# Altium PCB GPSDO_V2.0.PcbDoc (part 2 of 3)
Units mil, origin at the board's own origin, x right, y up, seen from the top; angles counter-clockwise.
Board outline 3461 x 3930 mil, 2 copper layers (Top Layer, Bottom Layer); 97 components, 56 nets, 415 pads, 225 vias.
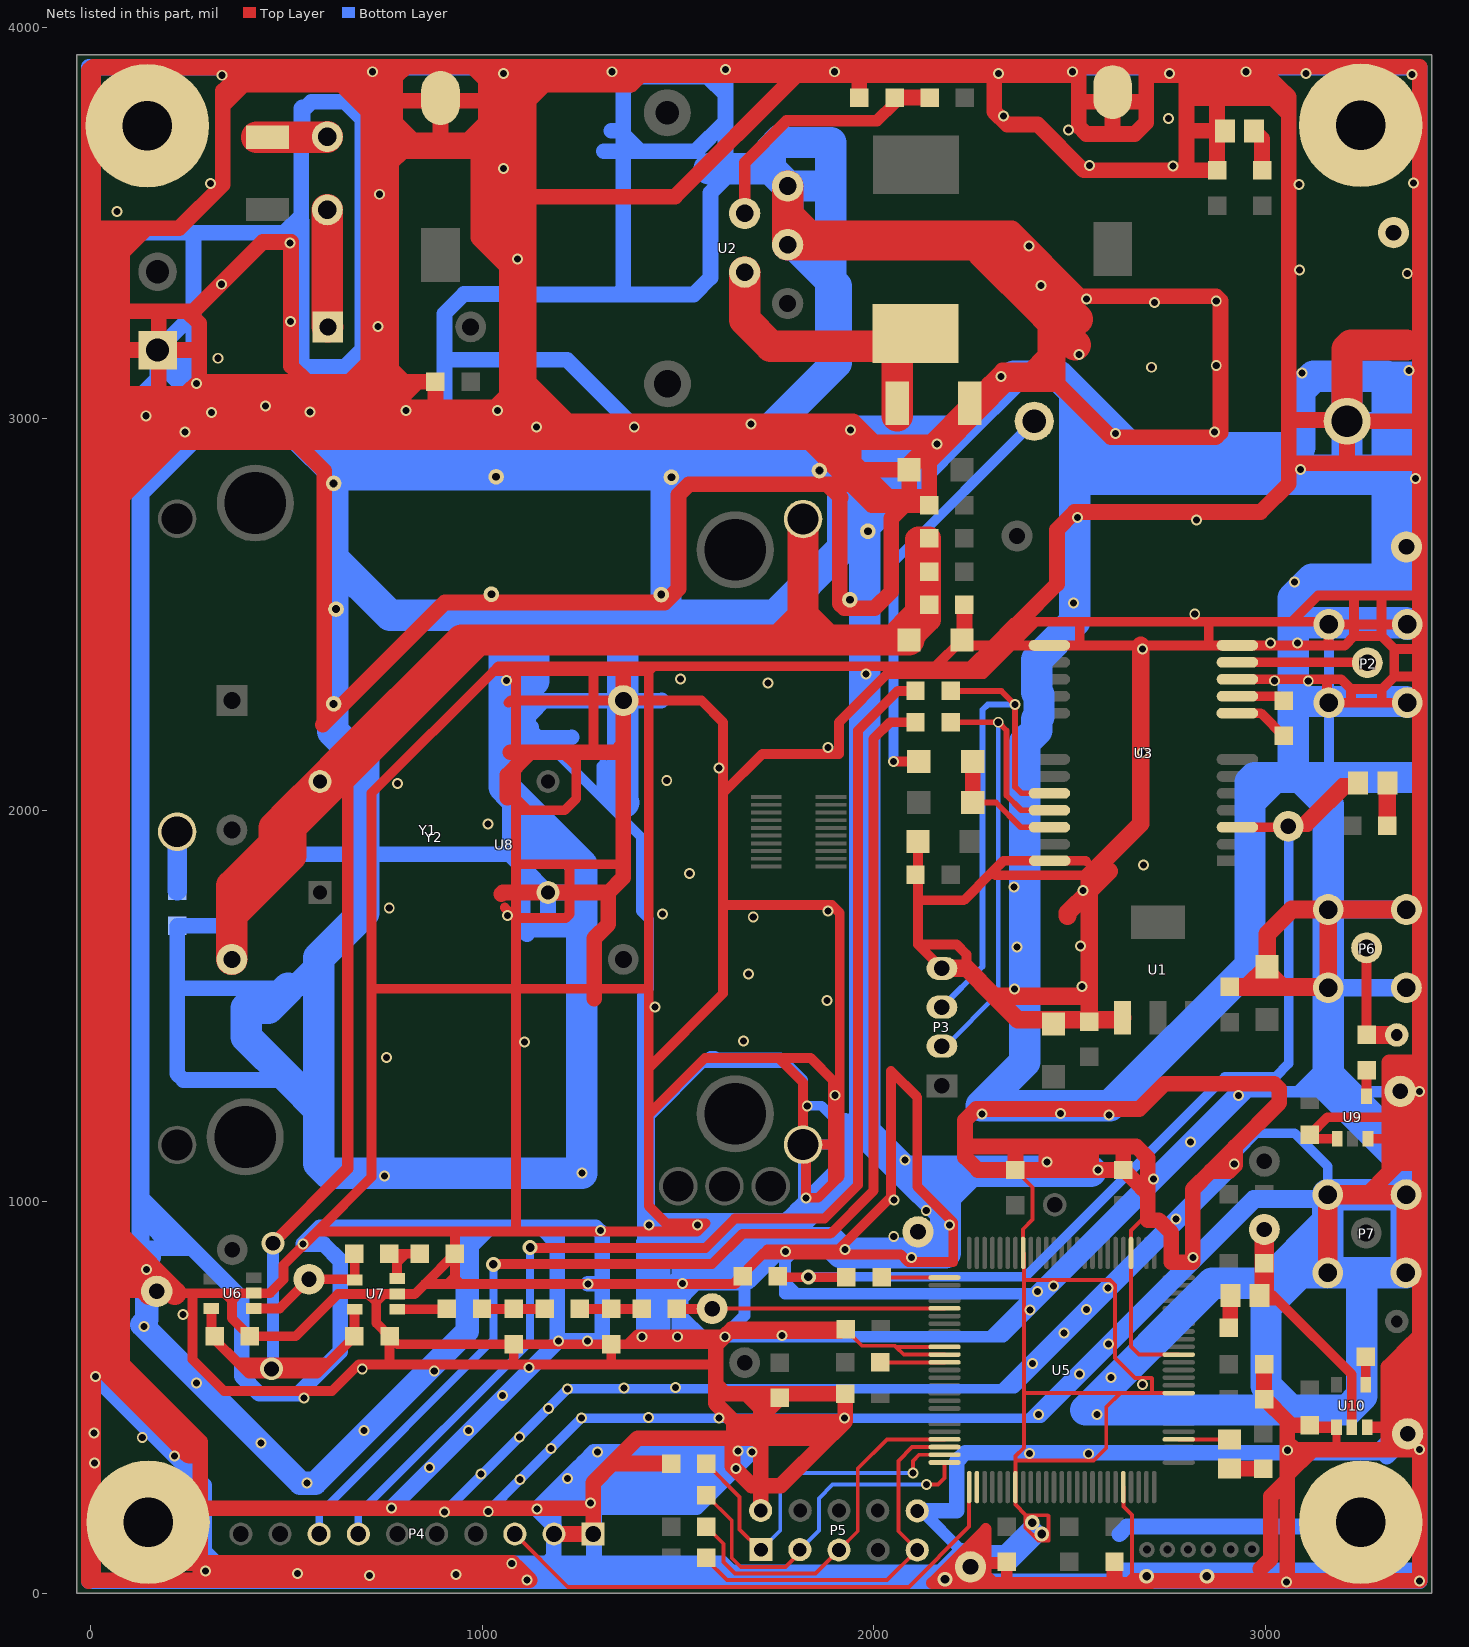
[diagram p2: the nets of this part, all layers, seen from the top]

## Via types
v1: diameter 28, hole 18, Top Layer to Bottom Layer, 206 vias
v2: diameter 38, hole 22, Top Layer to Bottom Layer, 13 vias
v3: diameter 58, hole 38, Top Layer to Bottom Layer, 6 vias

## Nets (pads, with @x,y where several pads share a name; then routed paths per layer and width w, separated by ;. In a path a pad name is that pad's centre, name@x,y a point inside that pad or via, vN(x,y) a via of type N, cw(c..) or ccw(c..) an arc to the next point about the centre after c; other vN are vias at no path point) (continued)
GND: BT1.2 C1.1 C2.1 C3.1 C4.1 C5.1 C6.1 C9.2 C10.1 C11.2 C12.2 C13.1 C18.2 C19.2 C20.2 C21.1 C22.1 C23.2 C24.1 C25.2 C26.1 C27.2 C28.1 C29.1 C30.1 C31.1 C32.1 C33.1 C34.1 C35.1 C36.2 D2.1 L7.1 LED2.2 P1.1 P2.2 P3.4 P4.1 P4.2 P5.2 P5.10 P6.2 P7.2 pad. pad.0@620,2272 pad.0@620,2835 pad.0@626,2514 pad.0@1023,2552 pad.0@1035,2852 pad.0@1457,2551 pad.0@1483,2851 pad.0@1861,2868 pad.0@1939,2538 pad.0@1985,2713 pad.1 pad.2 pad.3 pad.4 pad.6 pad.7 pad.10 R4.1 R10.1 R15.1 U1.1 U2.3 U2.5 U3.10 U3.12 U3.13 U3.24 U5.10 U5.11 U5.32 U5.46 U5.60 U5.65 U5.79 U5.93 U6.2 U7.2 U8.4 U9.1 U9.3 U10.1 U10.3 Y1.5 Y2.4 | length 213252.5
  Top Layer w10: C29.1@1928,674 1970,632 2054,632 2056.94,629.06 ; U5.11@2180.79,609.37 2076.63,609.37 2056.94,629.06 ; U5.10@2180.79,629.06 2056.94,629.06 ; C31.1@2362,1081 2406,1037 2406,954 2381.57,929.57 U5.93@2381.57,869.21 2383.35,867.43 2383.35,800 ; U5.46@2637.48,270.79 2637.48,221.52 2659.85,199.15 2659.85,35.99 2664,31.84 2664,25.5 ; 2685,1035 2685,954 2657.17,926.17 U5.79@2657.17,869.21 2657.17,629.83 2677.63,609.37 U5.65@2779.21,609.37 ; U5.60@2779.21,510.94 2711,510.94 ; 2361.89,339 2562,339 2594,371 2594,475 2629.94,510.94 ; 2361.89,339 U5.32@2361.89,270.79 2361.89,226.11 2388,200 2388,197 ; 2361.89,339 2361.89,349.89 2383.35,371.35 2383.35,511.65 ; 2383.35,511.65 2383.35,800 ; 2383.35,511.65 2384.06,510.94 2629.94,510.94 ; 2383.35,800 2603,800 2616,787 2616,601 2667,550 2710,550 2711,549 2711,510.94 ; 2388,197 2390,199 2444,199 2446,197 2446,134 2421,134 2388,167 2388,197 ; 2629.94,510.94 2711,510.94
  Top Layer w20: 3182,368 U10.1@3182,424
  Top Layer w25: 30.25,778 41.88,766.37 80.25,766.37 150,766.37 213.88,766.37 259,766.37 ; 1057,1752 1084,1725 1086,1725 ; 1067,2275 1072.32,2280.32 1086,2280.32 ; 1204,2148 1240,2112 ; 1240,2148 1240,2112 ; 1281,2148 1284,2151 1284,2280.32 ; 1360,1863 1359,1862 1222.5,1862 ; 1596.25,584 1326,584 ; C13.1@1665,809 1646,790 1640,790 ; C6.1@2112.96,1920 2112.96,1770 ; P3.4@2174,1596 2112.96,1657.04 ; C23.2@2231.6,2441.6 C23.2@2225,2435 ; 2237,1596 2237,1632 2211.96,1657.04 2112.96,1657.04 ; 2542,1870 2540.82,1871.18 U3.24@2449.5,1871.18 2331.18,1871.18 2302.5,1842.5 ; 2550,1834 2311,1834 2302.5,1842.5 ; U3.10@2929,2334.75 2929.25,2335 3158,2335 ; U9.1@3184,1161 3124,1161 C27.2@3114,1171 3159,1216 3317,1216 3353,1216 3374,1216 3394.5,1216 ; U9.3@3262.74,1160.96 3317,1160.96 3353,1160.96 3374,1160.96 3394.46,1160.96 3394.5,1161 ; P2.2@3362.73,2275.27 3362.5,2275.03 3292,2275.03 ; P2.2@3362.97,2475.03 3297,2475.03 ; 3394.5,2342 3330,2342 ; 3394.5,2410 3392.5,2412 3330,2412 ; 3394.5,2549 3297,2549 ; 259,766.37 259,597 340,516 616,516 684,584 759,584 ; 259,766.37 341,766.37 ; 341,766.37 360,747.37 ; 341,766.37 378.37,766.37 ; 360,747.37 360,702 C18.2@406,656 523,656 631.37,764.37 708,764.37 ; 360,747.37 360,748 378.37,766.37 ; 378.37,766.37 U6.2@416.08,766.37 457.37,766.37 492,801 492,838 578,924 ; 578,924 931,924 ; 578,924 717,1063 717,1543 ; 708,764.37 729,743.37 ; 708,764.37 748.37,764.37 ; 717,1543 718,1544 1086,1544 ; 717,1543 717,2044 1028,2355 ; 729,743.37 729,690 C19.2@763,656 ; 729,743.37 729,745 748.37,764.37 ; 748.37,764.37 U7.2@782.08,764.37 827.37,764.37 853,790 ; 759,584 1077,584 ; 759,584 763,588 C19.2@763,656 ; C19.2@763,656 783,636 C21.1@1080,636 ; 853,790 R10.1@930,867 ; 853,790 911,790 ; 911,790 930,809 ; 911,790 944,790 ; 930,809 R10.1@930,867 ; 930,809 930,804 944,790 ; R10.1@930,867 930,923 931,924 ; 931,924 1084,924 ; 944,790 v1(1270,790) 1640,790 ; 1028,2355 1086,2355 ; 1028,2355 1041,2368 1284,2368 ; 1077,584 1080,587 C21.1@1080,636 ; 1077,584 1326,584 ; C21.1@1080,636 C22.1@1329,636 ; 1084,924 1549,924 1570,945 1469,945 1425,989 1425,1223 ; 1084,924 1086,926 1086,1544 ; 1086,1544 1086,1725 ; 1086,1544 1286,1544 1425,1544 ; 1086,1725 1086,1790 1086,1862 ; 1086,1725 1213,1725 1222.5,1734.5 1222.5,1790 1222.5,1862 ; 1086,1862 1086,2000 ; 1086,1862 1222.5,1862 ; 1086,2000 1086,2030 ; 1086,2000 1116,2000 ; 1086,2030 1086,2112 1086,2148 1086,2280.32 ; 1086,2030 1116,2000 ; 1086,2280.32 1086,2355 ; 1086,2280.32 1284,2280.32 ; 1086,2355 1284,2355 ; 1116,2000 1210,2000 1240,2030 1240,2112 ; 1284,2280.32 1284,2355 ; 1284,2280.32 Y1.5@1360,2280.32 1425,2280.32 ; 1284,2355 1284,2368 ; 1284,2355 1358,2355 1424,2355 ; 1284,2368 1437,2368 ; 1326,584 1329,587 C22.1@1329,636 ; C22.1@1329,636 1371,636 ; 1371,636 1596.25,636 1609,636 ; 1371,636 v1@1396.5,661.5 ; v1@1396.5,661.5 1583.5,661.5 ; v1@1396.5,661.5 1409.25,648.75 1596.25,648.75 ; 1424,2355 1437,2368 ; 1424,2355 1425,2354 1425,2280.32 ; 1425,1223 1569,1367 1757,1367 ; 1425,1223 1425,1342 ; 1425,1342 1425,1544 ; 1425,1342 1615,1532 1615,1758 ; 1425,1544 1425,2280.32 ; 1425,2280.32 1559.68,2280.32 1615,2225 1615,2044 ; 1437,2368 2054,2368 ; 1583.5,661.5 1596.25,648.75 ; 1583.5,661.5 v1@1614,661.5 ; 1596.25,648.75 1609,636 ; 1609,636 1634.5,661.5 ; v1@1614,661.5 1634.5,661.5 ; v1@1614,661.5 1633.5,681 1654,681 ; 1615,1758 1893,1758 1913,1738 1913,1145 ; 1615,1758 1615,2044 ; 1615,2044 1715,2144 1911,2144 1911,2225 2034.12,2348.12 ; 1634.5,661.5 1915.5,661.5 C29.1@1928,674 1921,681 1654,681 ; 1634.5,661.5 1654,681 ; 1640,790 1715,865 ; 1715,865 2069,865 2088,846 2203,846 2203,947 2111,1039 2111,1267 2044,1334 2044,1012 1910,878 1728,878 1715,865 ; 1757,1367 1819.21,1304.79 U8.4@1819.21,1145.79 ; 1757,1367 1839,1367 1896,1310 1896,1145.79 ; U8.4@1819.21,1145.79 1827,1138 v1(1827,1010) 1858,1010 1896,1048 ; U8.4@1819.21,1145.79 1896,1145.79 ; 1896,1048 1896,1145.79 ; 1896,1048 1913,1065 1913,1145 ; 1896,1145.79 1912.21,1145.79 1913,1145 ; 2034.12,2348.12 2054,2368 ; 2034.12,2348.12 2256.12,2348.12 ; 2054,2368 2158,2368 ; 2112.96,1657.04 2112.96,1770 ; 2112.96,1770 2230,1770 2302.5,1842.5 ; 2158,2368 C23.2@2225,2435 ; 2158,2368 2246,2368 2299.36,2421.36 ; C23.2@2225,2435 2238.63,2421.36 2299.36,2421.36 ; 2256.12,2348.12 2329.36,2421.36 ; 2256.12,2348.12 2280.12,2348.12 2353.36,2421.36 ; 2299.36,2421.36 2360,2482 2372,2482 2390,2482 ; 2299.36,2421.36 2329.36,2421.36 ; 2329.36,2421.36 2390,2482 ; 2329.36,2421.36 2353.36,2421.36 ; 2353.36,2421.36 2414,2482 ; 2353.36,2421.36 U3.13@2448.68,2421.36 2526,2421.36 ; 2390,2482 2414,2482 ; 2414,2482 2535,2482 ; 2526,2421.36 2526,2473 2535,2482 ; 2526,2421.36 2682,2421.36 2856,2421.36 ; 2535,2482 2860,2482 ; 2856,2421.36 2856,2478 2860,2482 ; 2856,2421.36 U3.12@2929,2421.36 3162,2421.36 ; 2860,2482 3068,2482 ; 3068,2482 3135,2549 3227,2549 ; 3068,2482 3156,2482 P2.2@3162.97,2475.03 ; 3158,2335 3158,2280 P2.2@3162.97,2275.03 3222,2275.03 ; 3158,2335 3194,2335 3219,2310 ; 3162,2421.36 3162,2474.06 P2.2@3162.97,2475.03 ; 3162,2421.36 3203.36,2421.36 3227,2445 ; P2.2@3162.97,2475.03 3227,2475.03 ; 3219,2310 3298,2310 ; 3219,2310 3219,2278.03 3222,2275.03 ; 3222,2275.03 3292,2275.03 ; 3227,2445 3297,2445 ; 3227,2445 3227,2475.03 ; 3227,2475.03 3227,2549 ; 3227,2475.03 3297,2475.03 ; 3227,2549 3297,2549 ; 3292,2275.03 3298,2281.03 3298,2310 ; 3297,2445 3330,2412 ; 3297,2445 3297,2475.03 ; 3297,2475.03 3297,2549 ; 3298,2310 3330,2342 ; 3330,2342 3330,2412
  Top Layer w30: 2286,139 2286,127.5 ; 2286,164 2286,162.5 ; 2710,25.5 2664,25.5 2337,25.5 ; C36.2@3114,429 3119,424 U10.1@3171,424 ; 3182,368 3184,366 ; U10.3@3270,423.96 3315,423.96 3339.75,423.96 3360.25,423.96 3393.46,423.96 pad.2@3394.5,425 ; v2@2184,25.5 pad.7@2214.75,56.25 ; v2@2184,25.5 2265.5,25.5 ; v2@2184,25.5 2149,25.5 2286,162.5 ; pad.7@2214.75,56.25 pad.7@2235.5,77 ; pad.7@2214.75,56.25 2225,46 2286,46 ; pad.7@2235.5,77 pad.7@2255,77 ; pad.7@2235.5,77 2286,127.5 ; pad.7@2255,77 2286,46 ; pad.7@2255,77 2286,77 ; 2265.5,25.5 2306.5,25.5 ; 2265.5,25.5 2286,46 ; 2286,46 2286,77 ; 2286,46 2306.5,25.5 ; 2286,77 2286,127.5 ; 2286,77 2337,77 C34.1@2340,80 2340,28.5 2337,25.5 ; 2286,127.5 2286,162.5 ; 2306.5,25.5 2337,25.5
  Top Layer w40: -5.5,30.5 -5.5,3016 ; 6,3899.5 435,3899.5 ; 30.25,2945 35.25,2940 80.25,2940 ; 377,3878 337,3838 337,3805 ; 396.5,3897.5 6,3897.5 ; 592,2219 596,2223 ; 766.5,3169 766.5,3128.5 ; C9.2@893,3820 C9.2@893,3813 ; 1048,1786 1052,1790 1086,1790 Y2.4@1167.68,1790 1222.5,1790 1322,1790 ; 1064,2032 1064,2090 1086,2112 1122,2148 ; 1071,2148 1086,2148 1122,2148 ; P4.2@1183,151 P4.1@1283,151 1283,216.5 ; 1286,1519 1286,1544 1286,1673 1322,1709 1322,1790 ; 1358,2355 1360,2353 Y1.5@1360,2280.32 1360,2166 ; R15.1@1482,331 1332,331 ; 1596.25,648.75 1596.25,636 1596.25,584 1596.25,532.75 ; P5.2@1711,211 1711,274 ; 1780.02,3526 1806.52,3499.5 ; 1806.52,3487 1814.01,3487 2354,3487 2528,3313 2875,3313 2886,3302 2886,2965 2874,2953 2606,2953 2470,3089 ; 1882.5,3470 2312,3470 ; R4.1@1963,3821 1963,3877 1964,3878 ; 1971.5,2828.5 1967,2833 ; C23.2@2231.6,2441.6 C24.1@2231.6,2525 ; 2351,2461 2372,2482 2468,2578 2468,2717 2513,2762 2988,2762 3060,2834 3060,2887 ; 2433.5,3270.5 2438,3266 2438,3163 ; v1(2443,1102) 2443,1086 2440.5,1083.5 2440.5,1141 ; 2455,1114 2457,1112 2551,1112 2551,1141 ; 2470,3234 2470,3089 ; C11.2@2610,3835 C11.2@2610,3810 ; C35.1@2615,80 2615,35.5 2620,30.5 ; 2664,31.84 v1@3056,31.84 ; LED2.2@2897.2,3736 LED2.2@2877,3736 ; 2988,62 3014,88 3014,247 3056,289 ; C30.1@2997,585 C33.1@2997,495 3000.43,495 3056,439.43 ; C36.2@3114,429 3066.43,429 ; 3260,1018.03 3317,1075.03 ; 3349,1098 3350,1099 ; -5.5,3016 -1.5,3012 6,3012 ; -5.5,3016 -5.5,3056 ; -5.5,3056 2.5,3064 6,3064 ; -5.5,3056 -5.5,3340 ; -5.5,3340 6,3351.5 ; -5.5,3340 -5.5,3372 ; -5.5,3372 6,3383.5 ; -5.5,3372 -5.5,3416 ; -5.5,3416 6,3427.5 ; -5.5,3416 -5.5,3891 1,3897.5 6,3897.5 ; 6,3012 6,33 277,33 ; 6,3012 6,3064 ; 6,3012 30.25,3012 80.25,3012 ; 6,3064 6,3171 ; 6,3064 30.25,3064 80.25,3064 ; 6,3171 11,3176 30.25,3176 80.25,3176 ; 6,3171 6,3351.5 ; 6,3351.5 6,3383.5 ; 6,3351.5 30.25,3375.75 80.25,3425.75 ; 6,3383.5 6,3427.5 ; 6,3383.5 30.25,3407.75 80.25,3457.75 ; 6,3427.5 65.5,3487 ; 6,3427.5 6,3472 ; 6,3472 21,3487 65.5,3487 ; 6,3472 6,3897.5 ; 65.5,3487 109.5,3487 ; 80.25,2873.25 80.25,2815.25 80.25,900 80.25,836.12 80.25,766.37 80.25,584.75 279,386 pad.@279,216.5 ; 80.25,2873.25 80.25,2925.25 ; 80.25,2873.25 147,2940 ; 80.25,2925.25 80.25,2940 ; 80.25,2925.25 95,2940 ; 80.25,2940 95,2940 ; 80.25,2940 80.25,2959.25 ; 80.25,2959.25 80.25,2998 ; 80.25,2959.25 100,2979 ; 80.25,2998 94.25,3012 ; 80.25,2998 80.25,3012 ; 80.25,3012 94.25,3012 ; 80.25,3012 80.25,3064 ; 80.25,3064 80.25,3176 ; 80.25,3064 167,3064 ; 80.25,3176 P1.1@170,3176 P1.1@173,3176 ; 80.25,3176 80.25,3275 ; 80.25,3275 80.25,3425.75 ; 80.25,3275 173,3275 ; 80.25,3425.75 80.25,3457.75 ; 80.25,3425.75 141.5,3487 ; 80.25,3457.75 109.5,3487 ; 94.25,3012 112.25,3030 151,3030 ; 94.25,3012 v1@133,3012 ; 95,2940 147,2940 ; 95,2940 134,2979 ; 100,2979 134,2979 ; 100,2979 114.5,2993.5 ; 109.5,3487 141.5,3487 ; 114.5,2993.5 148.5,2993.5 ; 114.5,2993.5 v1@133,3012 ; v1@133,3012 167,3012 ; v1@133,3012 151,3030 ; 134,2979 484,2979 ; 134,2979 148.5,2993.5 ; 141.5,3487 225,3487 337,3599 337,3801.5 ; 147,2940 205,2940 523,2940 ; 148.5,2993.5 1110.5,2993.5 ; 148.5,2993.5 167,3012 ; 151,3030 185,3030 ; 167,3012 1043,3012 1079,3048 ; 167,3012 185,3030 ; 167,3064 173,3070 P1.1@173,3176 ; 167,3064 243,3064 ; P1.1@173,3176 276,3176 277,3177 ; P1.1@173,3176 173,3275 ; 173,3275 246,3275 ; 185,3030 v1@811,3030 ; 243,3064 v1@277,3098 ; 243,3064 777,3064 ; 246,3275 277,3244 277,3177 ; 246,3275 262,3275 439,3452 511,3452 511,3135 551,3095 ; 277,33 v1(1114,33) 1121,33 1091.5,62.5 ; 277,33 279,35 ; v1@277,3098 277,3177 ; v1@277,3098 280,3095 551,3095 ; 279,35 306.5,62.5 1091.5,62.5 ; 279,35 279,77 ; 279,77 1077,77 1091.5,62.5 ; 279,77 pad.@279,216.5 ; 279,77 250,77 pad.@146,181 181.5,216.5 pad.@279,216.5 ; pad.@279,216.5 1283,216.5 ; 337,3801.5 337,3805 ; 337,3801.5 389.5,3854 ; 337,3805 386,3854 389.5,3854 ; 389.5,3854 408.75,3873.25 ; 389.5,3854 640,3854 ; 408.75,3873.25 435,3899.5 ; 408.75,3873.25 620.75,3873.25 ; 435,3899.5 804,3899.5 ; 484,2979 v1@1125,2979 ; 484,2979 523,2940 ; 523,2940 1835,2940 ; 523,2940 596,2867 596,2223 ; 551,3095 661,3095 ; 596,2223 904,2531 1466,2531 1501,2566 1501,2806 1528,2833 1881,2833 ; 620.75,3873.25 640,3854 ; 620.75,3873.25 777.75,3873.25 ; 640,3854 681,3854 ; 640,3854 708,3786 ; 661,3095 708,3142 ; 661,3095 693,3095 ; 681,3854 777.75,3757.25 ; 681,3854 736.75,3854 ; 693,3095 708,3110 708,3142 ; 693,3095 739,3095 ; 708,3142 708,3786 ; 708,3786 740,3754 ; 736.75,3854 777.75,3813 ; 736.75,3854 758.5,3854 777.75,3873.25 ; 739,3095 740,3096 740,3754 ; 739,3095 766.5,3095 ; 740,3754 766.5,3727.5 ; 766.5,3095 766.5,3074.5 777,3064 ; 766.5,3095 766.5,3128.5 ; 766.5,3095 800,3095 ; 766.5,3128.5 800,3095 ; 766.5,3128.5 766.5,3654 ; 766.5,3654 796.5,3684 810,3684 ; 766.5,3654 766.5,3727.5 ; 766.5,3727.5 810,3684 ; 777,3064 803,3064 834,3095 ; 777,3064 v1@811,3030 ; 777.75,3757.25 777.75,3813 ; 777.75,3757.25 823,3712 890,3712 ; 777.75,3813 777.75,3873.25 ; 777.75,3813 C9.2@893,3813 ; 777.75,3873.25 804,3899.5 ; 800,3095 834,3095 ; 804,3899.5 974.5,3899.5 ; 810,3684 989,3684 ; v1@811,3030 879,3030 ; 834,3095 C10.1@880,3095 880,3031 879,3030 ; 879,3030 1032,3030 1062,3060 ; 890,3712 893,3715 C9.2@893,3813 ; 890,3712 963,3712 1009,3758 ; C9.2@893,3813 1006,3813 ; 974.5,3899.5 1009,3865 ; 974.5,3899.5 1009,3899.5 ; 989,3684 989,3463 1028.5,3423.5 ; 989,3684 1028.5,3723.5 ; 1006,3813 1009,3816 ; 1006,3813 1009,3813 ; 1009,3758 1009,3785.5 ; 1009,3758 1060,3758 1061.5,3756.5 ; 1009,3785.5 1009,3813 ; 1009,3785.5 1062,3785.5 ; 1009,3813 1009,3816 ; 1009,3813 1067,3813 ; 1009,3816 1009,3833 ; 1009,3816 1026,3833 ; 1009,3833 1026,3833 ; 1009,3833 1009,3865 ; 1009,3865 1009,3899.5 ; 1009,3865 1170,3865 ; 1009,3899.5 1823.5,3899.5 ; 1026,3833 1098,3833 ; 1026,3833 1047,3854 1159,3854 ; 1028.5,3423.5 1028.5,3723.5 ; 1028.5,3423.5 1062,3390 ; 1028.5,3723.5 1061.5,3756.5 ; 1061.5,3756.5 1062,3757 ; 1062,3060 1062,3390 ; 1062,3060 1098,3096 ; 1062,3390 1062,3568 ; 1062,3568 1098,3568 ; 1062,3568 1062,3757 ; 1062,3757 1062,3785.5 ; 1062,3757 1081.5,3776.5 ; 1062,3785.5 1062,3808 1067,3813 ; 1062,3785.5 1072.5,3785.5 1081.5,3776.5 ; 1067,3813 1098,3813 ; 1079,3048 1079,3025 1110.5,2993.5 ; 1079,3048 1083.5,3052.5 ; 1081.5,3776.5 1098,3793 ; 1083.5,3052.5 1128,3008 1128,2993.5 ; 1083.5,3052.5 1098,3067 ; 1098,3067 1098,3096 ; 1098,3067 1118,3087 1118,3095 ; 1098,3067 1157.5,3007.5 1157.5,2993.5 ; 1098,3096 1098,3115 ; 1098,3115 1098,3568 ; 1098,3115 1118,3095 ; 1098,3568 1118,3568 ; 1098,3568 1098,3793 ; 1098,3793 1098,3813 ; 1098,3793 1118,3813 ; 1098,3813 1098,3833 ; 1098,3813 1118,3813 ; 1098,3833 1118,3813 ; 1110.5,2993.5 v1@1125,2979 ; 1110.5,2993.5 1128,2993.5 ; 1118,3095 1118,3568 ; 1118,3095 1219.5,2993.5 ; 1118,3568 1492,3568 1802,3878 ; 1118,3568 1118,3813 ; 1118,3813 1159,3854 ; 1122,2148 1204,2148 1240,2148 1281,2148 1342,2148 1360,2166 ; v1@1125,2979 1128,2982 1128,2993.5 ; v1@1125,2979 v1(1138,2979) 1172,2979 ; 1128,2993.5 1157.5,2993.5 ; 1157.5,2993.5 1172,2979 ; 1157.5,2993.5 1219.5,2993.5 ; 1159,3854 1380,3854 1391,3865 ; 1159,3854 1170,3865 ; 1170,3865 1391,3865 ; 1172,2979 1234,2979 ; 1219.5,2993.5 1893.5,2993.5 ; 1219.5,2993.5 1234,2979 ; 1234,2979 v1(1388,2979) 1852,2979 ; 1283,216.5 1283,282 1332,331 ; 1322,1790 1360,1828 1360,1863 1360,2166 ; 1332,331 1397,396 1639,396 ; 1391,3865 1404,3878 1802,3878 ; 1596.25,532.75 1620,509 1675,509 ; 1596.25,532.75 1596.25,484.75 1643,438 ; 1639,396 1643,400 ; 1639,396 1706,396 ; 1639,396 1639,324 1689,274 1711,274 ; 1643,400 1643,438 ; 1643,400 1655,412 1711,412 ; 1643,438 1711,438 ; 1675,509 1711,473 1711,450 ; 1675,509 C20.2@1770,509 ; 1706,396 1711,391 ; 1706,396 1711,396 ; 1711,274 1762,274 1884,396 ; 1711,274 1711,391 ; 1711,391 1711,396 ; 1711,396 1884,396 ; 1711,396 1711,412 ; 1711,412 1900,412 ; 1711,412 1711,438 ; 1711,438 v1@1926,438 ; 1711,438 1711,450 ; 1711,450 C20.2@1760,499 C20.2@1770,509 ; C20.2@1770,509 C28.1@1927,509 1927,439 v1@1926,438 ; 1802,3878 1823.5,3899.5 ; 1802,3878 1964,3878 ; 1823.5,3899.5 3394.5,3899.5 3394.5,3313 3394.5,2997 ; 1835,2940 1910.5,2864.5 ; 1835,2940 1860,2940 ; 1852,2979 1865,2992 1895,2992 ; 1852,2979 1908,2979 ; 1860,2940 1930,2870 ; 1860,2940 1898,2940 ; 1881,2833 1942,2833 ; 1881,2833 1915,2799 1913,2797 1913,2528 1925,2516 2002,2516 2045,2559 2045,2746 2079,2780 ; 1884,396 1900,412 ; 1893.5,2993.5 1947.5,2993.5 1949,2992 ; 1893.5,2993.5 1895,2992 ; 1895,2992 1949,2992 ; 1895,2992 1908,2979 ; 1898,2940 1947,2940 ; 1898,2940 1947,2891 ; 1900,412 v1@1926,438 ; 1908,2979 1947,2940 ; 1910.5,2864.5 1942,2833 ; 1910.5,2864.5 1916,2870 1930,2870 ; 1930,2870 1967,2833 ; 1930,2870 1968,2870 ; 1942,2833 1995,2780 2019,2780 ; 1942,2833 1967,2833 ; 1947,2891 1947,2940 ; 1947,2891 1949,2889 ; 1947,2940 1949,2940 ; 1949,2889 1949,2940 ; 1949,2889 1968,2870 ; 1949,2940 1949,2992 ; 1949,2940 2001,2940 ; 1949,2992 2001,2940 ; 1964,3878 v1@2308,3878 ; 1967,2833 1999,2801 ; 1968,2870 C25.2@2090.2,2870 ; 1968,2870 2037,2801 ; 1999,2801 2037,2801 ; 1999,2801 2019,2781 2019,2780 ; 2001,2940 2123,2940 ; 2019,2780 2040,2780 ; 2037,2801 2091,2801 ; 2037,2801 2040,2798 2040,2780 ; 2040,2780 2079,2780 ; 2079,2780 2112,2780 ; C25.2@2090.2,2870 2141.6,2921.4 ; C25.2@2090.2,2870 2090.2,2801.8 2091,2801 ; C25.2@2090.2,2870 2090.2,2885.2 2134,2929 ; 2091,2801 2120.6,2801 C26.1@2141.6,2780 ; 2091,2801 2112,2780 ; 2112,2780 C26.1@2141.6,2780 ; 2123,2940 2134,2929 ; 2123,2940 2145,2940 ; 2134,2929 2141.6,2921.4 ; 2134,2929 2145,2940 ; C26.1@2141.6,2780 2141.6,2890.6 ; 2141.6,2890.6 2301,3050 2301,3051 ; 2141.6,2890.6 2141.6,2921.4 ; 2141.6,2921.4 v1@2160.2,2940 ; 2145,2940 D2.1@2245,3040 ; 2145,2940 v1@2160.2,2940 ; v1@2160.2,2940 D2.1@2252.6,3032.4 ; 2233,1141 2233,1114 2266,1081 C31.1@2362,1081 ; 2233,1141 2233,1208 2262,1237 2678,1237 2742,1301 3023,1301 3036,1288 3036,1253 2923,1140 ; 2233,1141 2367,1141 ; D2.1@2245,3040 D2.1@2252.6,3032.4 ; D2.1@2245,3040 2294,3089 ; D2.1@2252.6,3032.4 2309.2,3089 ; D2.1@2252.6,3032.4 2254,3031 2281,3031 2301,3051 ; 2294,3089 2329,3124 2399,3124 ; 2294,3089 2309.2,3089 ; 2301,3051 2339,3089 ; v1@2308,3878 2308,3785 2341,3752 2419,3752 2536,3635 2799,3635 ; v1@2308,3878 2524,3878 2524,3810 ; 2309.2,3089 2339,3089 ; 2339,3089 2429,3089 ; C31.1@2362,1081 2362,1136 2367,1141 ; C31.1@2362,1081 2554,1081 ; 2367,1141 2440.5,1141 ; 2399,3124 2438,3163 ; 2399,3124 2438,3124 ; 2429,3089 2438,3098 2438,3124 ; 2429,3089 2470,3089 ; 2438,3124 2438,3163 ; 2440.5,1141 2551,1141 ; 2524,3810 C11.2@2610,3810 ; 2524,3810 2524,3747 2543,3728 2608,3728 ; 2551,1141 2555,1137 2555,1081 ; 2551,1141 2631,1141 ; 2554,1081 2555,1081 ; 2554,1081 2555,1080 2555,1081 ; 2555,1081 C32.1@2637,1081 ; 2608,3728 2610,3730 C11.2@2610,3810 ; 2608,3728 2667,3728 2696,3757 2696,3807 ; C11.2@2610,3810 2693,3810 2696,3807 ; 2631,1141 2637,1135 C32.1@2637,1081 ; 2631,1141 2671,1141 2700,1112 2700,1020 ; C32.1@2637,1081 2639,1081 2685,1035 2700,1020 ; 2696,3807 2696,3878 2795,3878 ; 2700,1020 2700,953 2728,953 2760,921 2760,845 2814,845 2815,846 v1(2815,858) 2815,1032 2861.5,1078.5 ; 2795,3878 2799,3874 2799,3849 ; 2795,3878 2875,3878 ; 2799,3635 C12.2@2877,3635 LED2.2@2877,3736 ; 2799,3635 2799,3735 ; 2799,3735 2800,3736 LED2.2@2877,3736 ; 2799,3735 2799,3819 ; 2799,3819 2877,3819 ; 2799,3819 2799,3849 ; 2799,3849 2877,3849 ; 2861.5,1078.5 2923,1140 ; 2861.5,1078.5 2908.5,1078.5 2923,1093 2923,1140 ; 2875,3878 2877,3876 2877,3849 ; 2875,3878 3005,3878 3034,3849 ; LED2.2@2877,3736 2877,3819 ; 2877,3819 3020,3819 3060,3779 ; 2877,3819 2877,3849 ; 2877,3849 3034,3849 ; 3034,3849 3060,3823 3060,3779 ; v1@3056,31.84 3056,289 ; v1@3056,31.84 3394.5,31.84 v1@3394.5,364 ; 3056,289 3056,302 ; 3056,302 3056,386 ; 3056,302 3120,366 ; 3056,386 3056,418.57 ; 3056,386 3076,366 3120,366 ; 3056,418.57 3066.43,429 ; 3056,418.57 3056,439.43 ; 3056,439.43 3066.43,429 ; 3060,2887 3210,2887 ; 3060,2887 3060,2997 ; 3060,2997 3060,3375 3060,3779 ; 3060,2997 3206.21,2997 BT1.2@3209.21,2994 ; 3120,366 3184,366 3315,366 ; BT1.2@3209.21,2994 3209.21,2887.79 3210,2887 ; BT1.2@3209.21,2994 3391.5,2994 3394.5,2997 ; 3210,2887 3392.5,2887 3394.5,2889 ; 3315,366 3339,366 ; 3315,366 3315,423.96 3315,577.5 3339.75,602.25 ; 3317,1075.03 3340.97,1099 3350,1099 ; 3317,1075.03 3317,1160.96 3317,1216 3317,1356 3353,1356 ; 3339,366 3367,366 ; 3339,366 3339.75,366.75 3339.75,423.96 3339.75,602.25 ; 3339.75,602.25 3360.25,622.75 ; 3350,1099 3374,1099 ; 3350,1099 3353,1102 3353,1160.96 3353,1216 3353,1356 ; 3353,1356 3385.5,1356 ; 3360.25,622.75 3394.5,657 ; 3360.25,622.75 3360.25,423.96 3360.25,372.75 3367,366 ; 3367,366 3392.5,366 v1@3394.5,364 ; 3374,1099 3394.5,1099 ; 3374,1099 3374,1160.96 3374,1216 3374,1344.5 3385.5,1356 ; 3385.5,1356 3394.5,1365 ; v1@3394.5,364 3394.5,425 3394.5,657 ; 3394.5,657 3394.5,1099 ; 3394.5,1099 3394.5,1161 3394.5,1216 3394.5,1365 ; 3394.5,1365 3394.5,2342 3394.5,2410 3394.5,2549 3394.5,2889 ; 3394.5,2889 3394.5,2997
  Top Layer w45: P3.4@2174,1596 2237,1596 2308,1525 ; 2495,1730 2495,1738 2550,1793 ; C3.1@2550,1460 C3.1@2550,1464.8 ; 2601,1844 2550,1793 ; U1.1@2635.45,1469.95 2630.3,1464.8 C3.1@2550,1464.8 ; v1@2682,2421.36 2682,1966 2550,1834 2550,1793 ; C1.1@2910,1548.6 2953.4,1548.6 ; P6.2@3360.97,1746.53 P6.2@3160.97,1746.53 ; 2308,1525 2549,1525 2550,1524 ; 2308,1525 2368.2,1464.8 C3.1@2550,1464.8 ; C3.1@2550,1464.8 2550,1524 ; 2550,1524 2550,1793 ; 2953.4,1548.6 3044,1548.6 ; 2953.4,1548.6 C2.1@3005,1600.2 ; C2.1@3005,1600.2 3005,1587.6 3044,1548.6 ; C2.1@3005,1600.2 3005,1684 3067.53,1746.53 P6.2@3160.97,1746.53 ; 3044,1548.6 3158.9,1548.6 P6.2@3160.97,1546.53 P6.2@3160.97,1746.53
  Top Layer w50: P7.2@3159.97,818.03 P7.2@3159.97,1018.03 3260,1018.03 P7.2@3359.97,1018.03 3359.97,818.5 P7.2@3359.73,818.27
  Top Layer w60: 30.25,3407.75 30.25,3375.75 30.25,3176 30.25,3064 30.25,3012 30.25,2945 30.25,2765.25 ; 80.25,836.12 pad.1@150,766.37 ; 205,2940 80.25,2815.25 30.25,2765.25 ; 213.88,766.37 80.25,900 30.25,950 ; 252,361 30.25,582.75 30.25,778 30.25,950 ; 30.25,950 30.25,2765.25
  Top Layer w80: U2.5@1780.02,3595.01 1780.02,3526 1780.02,3521 ; 2270,3434 2270,3445.01 ; 2433.5,3270.5 2280,3424 2280,3445.01 ; 2438,3266 2470,3234 2515,3189 ; 2520,3255 2329.99,3445.01 2280,3445.01 ; BT1.2@3209.21,2994 3209.21,3178.21 3220,3189 3361,3189 ; 1780.02,3521 1814.01,3487 1856,3445.01 ; 1780.02,3521 U2.3@1780.02,3445.01 1856,3445.01 ; 1856,3445.01 2270,3445.01 ; 2270,3445.01 2280,3445.01
  Bottom Layer w25: v1(903,207) v1(1095,399) v1(1218,522) 2325,522 ; v1(1015,209) v1(1096,290) v1(1253,447) v1(1605,447) v1(1925,447) 2397,447 ; 1132,2498 1125,2491 1125,2324 1125,2248 1125,2212 1152,2185 1304,2033 ; 1408,898 1408,1198 ; 1441,931 1428,944 1428,1218 ; 1808,1323 1777,1354 ; 1818,965 1819.21,966.21 U8.4@1819.21,1145.79 ; v1(1830,1245) 1867,1245 1925,1187 ; 1925,1145 1924.21,1145.79 U8.4@1819.21,1145.79 ; 3153,2084 3162.97,2093.97 P2.2@3162.97,2275.03 ; P2.2@3362.73,2275.27 3362.5,2275.03 P2.2@3162.97,2275.03 ; P2.2@3362.97,2475.03 P2.2@3162.97,2475.03 3162.97,2278 P2.2@3162.97,2275.03 ; 1304,2033 1313.5,2023.5 ; 1304,2033 1304,2113 1309,2118 1313.5,2113.5 1313.5,2023.5 ; 1313.5,2023.5 1405,1932 1405,1742 1426,1721 1426,1545 1408,1527 1408,1198 ; 1408,1198 1428,1218 ; 1428,1218 1564,1354 ; 1564,1354 1582,1372 1595,1372 1598,1369 1762,1369 1777,1354 ; 1564,1354 1777,1354 ; 1777,1354 1819.21,1311.79 U8.4@1819.21,1145.79 ; 2325,522 2930,1127 ; 2325,522 2360,522 2930,1092 2930,1127 ; 2397,447 2968.03,1018.03 P7.2@3159.97,1018.03 ; 2397,447 2428,447 2978,997 3138.94,997 P7.2@3159.97,1018.03 ; 2930,1127 2978,1175 3075,1175 3159.97,1090.03 P7.2@3159.97,1018.03
  Bottom Layer w30: 1441,931 1408,898 v1(1408,655) v1(1498,655) ; 1510,873 1511,872 1511,853 ; 1669.37,813.37 1669.37,708.37 v1@1616,655 ; 1773,813 1773,794 ; 1818,895 1773,850 1773,794 ; P5.10@2111,210 2122,210 2224.5,107.5 ; pad.7@2271,81 2306,81 2332.5,107.5 ; v1(2418,771) 2412,765 v1@2407,765 ; 3160.97,1325.03 3116.94,1281 ; 3160.97,1372 3160.97,1358.97 3083,1281 ; 3316,1018.03 3316,1102 3137,1281 ; v1(3394,1281) 3205,1281 3137,1281 ; v1(1498,655) 1498,686 ; v1(1498,655) 1529,655 ; 1498,686 1498,774 1498,840 1511,853 ; 1498,686 1529,655 ; 1511,853 v1(1511,791) 1511,787 1511,708 1564,655 ; 1529,655 1564,655 ; 1564,655 v1@1616,655 ; v1@1616,655 v1(1620,655) 2297,655 ; 1773,794 1773,765 1802,765 ; 1773,794 1802,765 ; 1802,765 v1@2407,765 ; 2224.5,107.5 2332.5,107.5 ; 2224.5,107.5 2255,77 2333,77 ; 2297,655 v1@2407,765 ; 2297,655 2331,655 v1(2399,723) 2957,1281 ; 2332.5,107.5 2337.5,107.5 2350.5,94.5 ; 2332.5,107.5 v2(2405,180) v2@2405,175 ; 2333,77 2355,77 v2(2429,151) v2@2405,175 ; 2333,77 2350.5,94.5 ; 2350.5,94.5 2405,149 v2@2405,175 ; v1@2407,765 2923,1281 2957,1281 ; 2957,1281 3083,1281 ; 3083,1281 3116.94,1281 ; 3116.94,1281 3137,1281
  Bottom Layer w40: 124,803 124,881 ; 134,2925 129,2930 ; pad.@146,181 215,181 289,107 ; 159,857 135,881 ; v1(293,56) 340,56 ; 510,2969 489,2948 ; 540,3796 538,3794 538,3752.23 ; 582,1315 578,1311 507,1311 236,1311 220,1327 220,1551 ; 582,1545 504,1545 ; 582,1623 504,1545 ; pad.0@618,2841 511,2948 489,2948 ; 697,1843 652.32,1887.68 ; 697,1936 648.68,1887.68 ; v1(768,218) v1(1194,644) ; 899,2969 903,2973 903,3151 ; 961,876 1020,935 ; 1103,1920 1103,1887.68 ; v1(1114,33) 1091,56 ; 1114,1684 1103,1695 ; 1125,2212 1098,2185 ; v1@1144,219 1145,220 1182,220 ; P4.2@1183,151 1183,171 P4.2@1182,172 ; 1213.5,1901.5 1199.68,1887.68 1103,1887.68 ; 1228,2187 1226,2185 1152,2185 1098,2185 ; 1254,1700 1249,1695 1158,1695 ; 1254,1790 Y2.4@1167.68,1790 ; v1(1270,790) 1306,790 ; v1(1276,230) 1285,221 v1@1285,220 ; 1310,3684 1360,3684 ; 1330,3736 1350,3736 1360,3726 ; v1(1388,2979) 1216,3151 903,3151 ; 1458,2281 1457.32,2280.32 Y1.5@1360,2280.32 1359,2280.32 1157.32,2280.32 1125,2248 1070,2193 1070,2185 ; v1(1621,3893) 1621,3871 ; P5.10@2122,210 2212,210 2212,337 2234,359 3285.5,359 ; 2224.5,107.5 2169.75,52.75 ; pad.7@2225,77 2200.75,52.75 ; pad.7@2255,77 2230.75,52.75 2200.75,52.75 ; 2627,150 2647,170 3233,170 pad.@3244,181 ; 2630,58 3390.5,58 3394.5,62 ; 3088,3000 3091,2997 3209,2997 3311,2997 3368,2997 3394.5,2997 ; 3311,348 3322,359 ; 124,881 124,3057 170,3103 ; 124,881 135,881 ; 129,962 129,1010 ; 129,962 129,887 135,881 ; 129,962 210,881 ; 129,1010 129,2809 ; 129,1010 258,881 ; 129,2809 268,2948 489,2948 ; 129,2809 129,2930 ; 129,2930 129,3060 164,3060 ; 135,881 210,881 ; 164,3060 170,3066 170,3103 ; 164,3060 231,3060 258.5,3087.5 262,3091 262,3268 ; 170,3103 P1.1@170,3176 262,3268 ; 210,881 258,881 ; 220,1551 L7.1@220,1705 344,1705 526.68,1887.68 648.68,1887.68 ; 220,1551 226,1545 504,1545 ; 258,881 385,754 385,554 430,509 529,509 637,617 637,849 594,892 v1(542,892) 585,935 1020,935 ; 262,3268 262,3476 ; 262,3476 105.5,3476 -5.5,3365 -5.5,3899.5 -4,3898 1418,3898 ; 262,3476 494,3476 537.63,3519.63 ; 289,107 289,275 v1(11,553) -5.5,536.5 -5.5,30.5 299,30.5 ; 289,107 319.5,76.5 ; 289,107 289,40.5 299,30.5 ; 299,30.5 v1@1127,30.5 ; 319.5,76.5 v1@1070.5,76.5 ; 319.5,76.5 340,56 ; 340,56 1091,56 ; 537.63,3519.63 537.63,3506.51 538,3506.14 538,3133 649,3133 693,3177 693,3766 649,3810 563,3810 541,3788 541,3755.23 538,3752.23 ; 537.63,3519.63 537.63,3748.86 ; 537.63,3748.86 538,3749.23 538,3752.23 ; 537.63,3748.86 537.63,3751.86 538,3752.23 ; 648.68,1887.68 652.32,1887.68 ; 652.32,1887.68 697,1887.68 1070,1887.68 ; 903,3151 903,3269 953,3319 1055,3319 1056,3318 1347,3318 ; 1020,935 1150,935 ; 1070,1887.68 1103,1887.68 ; 1070,1887.68 1103,1854.68 ; 1070,1887.68 1070,2045 1070,2157 ; 1070,2157 1098,2185 ; 1070,2157 1070,2185 ; 1070,2185 1098,2185 ; v1@1070.5,76.5 1166,76.5 ; v1@1070.5,76.5 1091,56 ; 1091,56 1101.5,56 ; 1101.5,56 v1@1127,30.5 ; 1101.5,56 1186.5,56 ; 1103,1695 1158,1695 ; 1103,1695 1103,1854.68 ; 1103,1854.68 1103,1887.68 ; 1103,1854.68 Y2.4@1167.68,1790 ; v1@1127,30.5 1212,30.5 ; 1150,935 1191,935 ; 1150,935 1191,894 ; 1158,1695 1167.68,1704.68 Y2.4@1167.68,1790 ; 1166,76.5 1285,76.5 ; 1166,76.5 1182,92.5 P4.2@1182,172 ; 1166,76.5 1186.5,56 ; 1173.5,249.5 1518.5,249.5 1548,220 ; 1173.5,249.5 v1(1139,215) P4.2@1182,172 ; 1173.5,249.5 1188.5,264.5 ; P4.2@1182,172 1182,220 ; 1182,220 v1@1285,220 ; 1186.5,56 1212,30.5 ; 1186.5,56 1590.5,56 1616,30.5 ; 1188.5,264.5 1581.5,264.5 1587,259 ; 1188.5,264.5 v1(1217,293) ; 1191,894 1191,935 ; 1191,894 1191,647 v1(1194,644) ; 1191,935 1289,935 1306,918 1306,790 ; v1(1194,644) v1(1269,644) 1306,644 1306,790 ; 1212,30.5 1616,30.5 ; v1(1217,293) 1621,293 ; v1(1217,293) 1240.5,316.5 ; 1240.5,316.5 1596.5,316.5 1614,334 ; 1240.5,316.5 1258,334 ; 1258,334 1285,361 v1(1294,361) v1(1689,361) 1657,329 ; 1258,334 1614,334 ; 1285,76.5 1612,76.5 1635.75,52.75 ; 1285,76.5 v1@1285,220 ; v1@1285,220 1548,220 ; 1347,3318 1540,3318 1583,3361 1583,3578 1621,3616 1621,3639 1621,3760 ; 1347,3318 1360,3331 1360,3684 ; 1360,3684 1402,3684 ; 1360,3684 1360,3726 ; 1360,3726 1402,3684 ; 1360,3726 1360,3840 1394,3874 ; 1394,3874 1576,3874 ; 1394,3874 1418,3898 ; 1402,3684 1545,3684 1621,3760 ; 1418,3898 3394.5,3898 3394.5,2997 ; 1548,220 1587,259 ; 1576,3874 1618,3874 1621,3871 ; 1576,3874 1621,3829 ; 1587,259 1621,293 ; 1614,334 1652,334 1657,329 ; 1616,30.5 1658,30.5 ; 1621,293 1657,329 ; 1621,3760 1621,3829 ; 1621,3829 1621,3871 ; 1635.75,52.75 2169.75,52.75 ; 1635.75,52.75 1658,30.5 ; 1658,30.5 v2@2178.5,30.5 ; 2169.75,52.75 2200.75,52.75 ; v2@2178.5,30.5 v1(3394.5,30.5) 3394.5,62 ; v2@2178.5,30.5 2200.75,52.75 ; 3285.5,359 3322,359 ; 3285.5,359 3394.5,468 ; 3322,359 pad.2@3394.5,431.5 ; 3394.5,62 pad.2@3394.5,431.5 ; pad.2@3394.5,431.5 3394.5,468 ; 3394.5,468 3394.5,2997
  Bottom Layer w45: P6.2@3160.97,1546.53 3360.5,1546.53 P6.2@3360.73,1546.77 ; P6.2@3160.97,1746.53 P6.2@3360.97,1746.53
  Bottom Layer w60: v1(142,827) 142,698 130,686 535,281 573,281 961,669 961,876 961,916
  Bottom Layer w80: P1.1@170,3176 258.5,3087.5 377,2969 510,2969 557,2969 ; 504,1545 453,1494 397,1494 397,1421 507,1311 582,1236 ; 1103,1920 1121.5,1901.5 1213.5,1901.5 ; 1362,2020 1359,2023 1359,2280.32 1359,2498 ; 1441,681 1441,873 ; 1498,774 1511,787 1537.37,813.37 1669.37,813.37 1713,857 ; 1580,3639 1621,3639 1736.03,3639 ; 1818,965 1784,931 1441,931 1441,873 ; 1819.21,966.21 1925,1072 1925,1145 1925,1187 ; 2555,1078 2247,1078 ; 3209,2893 3209,2997 3209,3109 ; P2.2@3362.73,2275.27 3360,2278 3162.97,2278 3072,2278 ; P2.2@3362.97,2475.03 3359,2479 3072,2479 ; 3374.5,2084 3153,2084 3091,2084 ; 557,2969 618,2969 ; 557,2969 618,2908 ; 582,1236 582,1315 582,1545 582,1623 697,1738 697,1843 697,1887.68 697,1936 697,2123 618,2202 618,2644 ; 582,1236 582,1098 607,1073 v1(1254,1073) 1254,1700 1254,1790 1254,1861 1213.5,1901.5 ; 618,2644 pad.0@618,2841 ; 618,2644 764,2498 1050,2498 ; pad.0@618,2841 618,2908 ; pad.0@618,2841 634,2857 pad.0@1469,2857 ; 618,2908 618,2969 ; 618,2908 621,2905 1469,2905 ; 618,2969 899,2969 1500,2969 ; 1050,2498 1132,2498 ; 1050,2498 1055,2493 1055,2254 ; 1055,2254 1125,2324 1132,2331 1132,2498 ; 1055,2254 1055,2060 1070,2045 1213.5,1901.5 ; 1132,2498 1359,2498 ; 1359,2498 1469,2498 ; 1441,873 1510,873 1697,873 1713,857 ; 1469,2498 pad.0@1469,2857 ; 1469,2498 1748,2498 1920,2670 ; pad.0@1469,2857 1920,2857 ; pad.0@1469,2857 1469,2905 ; 1469,2905 1469,2938 1500,2969 ; 1469,2905 1920,2905 ; 1500,2969 1730,2969 ; 1713,857 1751,895 1818,895 1892,895 1918,869 2183,869 2183,973 ; 1730,2969 1920,2969 ; 1730,2969 1890,3129 ; 1736.03,3639 1736.03,3687.03 1762,3713 1769,3706 1890,3706 1890,3598 ; 1736.03,3639 U2.5@1780.02,3595.01 ; U2.5@1780.02,3595.01 1887.01,3595.01 1890,3598 ; U2.5@1780.02,3595.01 U2.3@1780.02,3445.01 1797.99,3445.01 1890,3353 ; 1890,3129 1904,3143 1904,3339 1890,3353 ; 1890,3129 1890,3353 ; 1890,3353 1890,3598 ; 1920,2670 1920,2857 ; 1920,2670 pad.0@1977,2727 ; 1920,2857 1920,2905 ; 1920,2905 1920,2969 ; 1920,2969 1975,2969 ; 1975,2969 2029,2969 ; 1975,2969 1975,2729 pad.0@1977,2727 ; pad.0@1977,2727 1977,1179 2078,1078 ; pad.0@1977,2727 2041.5,2791.5 ; 2029,2969 2087,2969 ; 2029,2969 2029,2804 2041.5,2791.5 ; 2041.5,2791.5 2104.5,2854.5 ; 2078,1078 2183,973 ; 2078,1078 2247,1078 ; 2087,2969 2219,2969 ; 2087,2969 2087,2872 2104.5,2854.5 ; 2104.5,2854.5 2219,2969 ; 2183,973 2183,1014 2247,1078 ; 2219,2969 2359,3109 2473,3109 2513.5,3068.5 ; 2513.5,2846 2513.5,2964 ; 2513.5,2846 2513.5,2482.5 2416,2385 2416,2301.27 2422,2295.27 2422,2238.73 2416,2232.73 2416,2204 2386,2174 2386,1357 2274,1245 2603,1245 2961,1603 2961,2021 ; 2513.5,2846 3288,2846 3311,2869 ; 2513.5,2964 2513.5,3068.5 ; 2513.5,2964 2608.5,2869 3311,2869 ; 2513.5,3068.5 2655,2927 3088,2927 3088,3000 3088,3073 3124,3109 3209,3109 ; 2961,2021 2961,2072 2973,2084 3024,2084 ; 2961,2021 3024,2084 ; 3002,731 3002,792 ; 3002,731 3002,530 3064,468 ; 3002,731 3089.03,818.03 P7.2@3159.97,818.03 ; 3002,792 2865,792 2541,468 3064,468 ; 3002,792 3159.97,949.97 ; 3024,2084 3091,2084 ; 3064,468 3211,468 3247,504 3247,818.27 ; 3072,2278 3072,2479 ; 3072,2278 3072,2103 3091,2084 ; 3072,2479 3072,2542 3120,2590 3294,2590 ; 3091,2084 3160.97,2014.03 P6.2@3160.97,1746.53 P6.2@3160.97,1546.53 3160.97,1358.97 3160.97,1325.03 3205,1281 3359.97,1126.03 P7.2@3359.97,1018.03 ; P7.2@3159.97,818.03 3159.97,949.97 ; P7.2@3159.97,818.03 3160.2,818.27 3247,818.27 ; 3159.97,949.97 P7.2@3159.97,1018.03 3316,1018.03 P7.2@3359.97,1018.03 ; 3209,3109 3311,3109 ; 3247,818.27 P7.2@3359.73,818.27 3359.97,818.5 P7.2@3359.97,1018.03 ; 3294,2590 3357,2590 3368,2601 3368,2997 3368,3107 3313,3107 3311,3109 ; 3294,2590 3311,2607 3311,2869 ; 3311,2869 3311,2997 3311,3109
  other v1: 3054,28 711,45 933,47 528,50 1075,76 552,281 997,304 1648,318 865,321 9,332 213,350 2548,356 2398,357 1653,363 3057,365 3394,367 1175,370 434,384 131,398 8,409 697,415 964,415 1424,449 2421,456 2570,456 1169,472 544,499 1051,505 1362,524 1493,525 2687,533 269,537 2606,551 2525,560 877,568 693,573 1119,576 2406,587 2600,637 1765,658 2486,665 136,681 235,712 2543,724 2598,780 2459,785 2096,858 1774,873 1927,878 2051,911 1302,926 1426,940 1550,940 2193,941 2772,956 2134,978 2052,1004 2715,1058 750,1066 2573,1081 2921,1096 2080,1107 2809,1153 2601,1222 2276,1224 2477,1225 2932,1271 1901,1272 755,1368 1108,1408 1667,1410 1441,1498 1881,1514 2359,1544 2532,1550 1680,1582 2366,1651 2528,1653 1692,1727 1064,1731 1460,1735 1883,1743 762,1750 2534,1795 2358,1804 1529,1838 2689,1860 1014,1965 783,2069 1471,2076 1605,2108 2686,2148 1883,2161 1730,2325 3110,2330 3024,2331 1062,2332 1506,2335 1980,2348 2686,2412 3013,2427 3083,2428 2820,2501 2510,2530 3075,2583 2824,2742 2521,2748 3384,2848 3090,2871 2161,2936 2618,2963 240,2966 2871,2967 1940,2972 1686,2987 141,3008 308,3016 560,3018 805,3021 1039,3022 446,3033 269,3090 2325,3108 3094,3117 3367,3124 2710,3132 2875,3136.5 325,3155 2524,3164 733,3236 510,3249 2717,3297 2875,3301 2544,3306 2427,3341 333,3344 3363,3372 3088,3381 1090,3409 2396,3442 508,3449 66,3530 737,3574 3086,3599 305,3601 3379,3603 1054,3640 2765,3646 2551,3648 2498,3738 2753,3768 2331,3774 335,3878 3375,3880 1054,3882 2319,3882 2755,3882 3104,3882 719,3887 1331,3887 1900,3887 2508,3887 2951,3887
  other v2: 2182,35.5 2697,43 2851,43
GPS_RX: P4.8 R5.1 | length 3205.7
  Top Layer w25: v2@1024,841 1587,841 1664,918 1889,918 1999,1028 1999,2183 2041,2225 R5.1@2106.56,2225
  Bottom Layer w20: P4.8@583,151 583,202 1028,647 v2(1028,840)
GPS_TX: P4.7 R6.1 | length 3166.9
  Top Layer w25: v2@1123,882 1570,882 1645,957 1874,957 1960,1043 1960,2204 2061,2305 R6.1@2106.56,2305
  Bottom Layer w20: P4.7@683,151 683,202 1122,641 v2(1122,883)
JTAG-TCK: P5.1 R15.2 U5.24 | length 927.5
  Top Layer w10: R15.2@1572,331 1657,246 1657,163 1709,111 P5.1@1712,111 ; v1(2100,307) 2100,338 2115.46,353.46 U5.24@2180.79,353.46
  Bottom Layer w10: P5.1@1712,111 1761,160 1761,263 1805,307 v1(2100,307)
JTAG-TDI: P5.9 R18.1 U5.23 | length 977.1
  Top Layer w10: R18.1@1572,90 1572,86 1625,33 2034,33 P5.9@2111,110 2063,158 2063,338 2098.15,373.15 U5.23@2180.79,373.15
JTAG-TDO: P5.3 R16.1 U5.25 | length 926.3
  Top Layer w10: R16.1@1572,250 1637,185 1637,90 1660,67 1774,67 1811,104 P5.3@1811,111 ; v1(2135,277) 2164,277 2180.79,293.79 U5.25@2180.79,333.78
  Bottom Layer w10: P5.3@1811,111 1860,160 1860,242 1895,277 v1(2135,277)
JTAG-TMS: P5.5 R17.1 U5.22 | length 921.8
  Top Layer w10: R17.1@1572,170 1616,126 1616,79 1645,50 1851,50 P5.5@1911,110 1959,158 1959,318 2033.83,392.83 U5.22@2180.79,392.83
LOCK_LED: BITE1.2 U5.54 | length 129.8
  Top Layer w10: U5.54@2779.21,392.83 BITE1.2@2909,392.8
N303_1PPS: C13.2 LED1.2 R8.2 T1.1 U3.3 | length 2793.8
  Top Layer w25: C13.2@1760,807 R8.2@1930,807 ; U3.3@2929,1956.8 3109.8,1956.8 LED1.2@3223,2070 ; T1.1@3059,1959 3084,1959 3195,2070 LED1.2@3223,2070 ; LED1.2@3237.2,2070 LED1.2@3223,2070
  Bottom Layer w25: v2(1833,808) 2386,808 2897,1319 3026,1319 3060,1353 T1.1@3060,1959
Net7_1: 7.1 LED3.2 R21.1 U10.2 | length 680.3
  Top Layer w25: U10.2@3221.37,423.92 3221.37,558.63 3033,747 ; 3033,747 2998.8,747 LED3.2@2985.8,760 3020,760 3033,747
  Top Layer w50: LED3.2@2985.8,760 2998,772.2 7.1@2998,929
Net10M_1: 10M.1 P6.1 R24.2 | length 299.5
  Top Layer w25: R24.2@3259,1426 P6.1@3259,1648.5
  Top Layer w45: R24.2@3259,1426 10M.1@3336,1426
NetBITE1_1: BITE1.1 R22.1 | length 86
  Top Layer w40: BITE1.1@2909,318 R22.1@2995,318
NetBT1_1: BT1.1 D4.1 | length 1083.1
  Top Layer w25: v1(2050,2125) D4.1@2115,2125
  Bottom Layer w25: v1(2050,2125) 2050,2634 BT1.1@2410,2994
NetC21_2: C21.2 R12.1 R13.2 | length 160
  Top Layer w25: R12.1@999,726 C21.2@1080,726 R13.2@1159,726
NetC22_2: C22.2 R13.1 R14.2 | length 158
  Top Layer w25: R13.1@1249,726 C22.2@1329,726 R14.2@1407,726
NetD1_2: D1.2 L3.1 | length 181.4
  Top Layer w80: D1.2@423,3720 603,3720 L3.1@604,3721
NetD2_2: D2.2 L1.1 U2.2 | length 802.2
  Top Layer w80: U2.2@1670.02,3375.01 1670.02,3252.98 1737,3186 L1.1@2075,3186 ; D2.2@2060,3008 2060,3171 L1.1@2075,3186 ; L1.1@2093,3186 L1.1@2075,3186 ; L1.1@2107,3218 L1.1@2075,3186
NetD3_2: D3.2 D4.2 U3.22 | length 327.1
  Top Layer w15: D3.2@2252.8,2020 2312,2020 2375.2,1956.8 U3.22@2448.68,1956.8
  Top Layer w40: D3.2@2252.8,2020 D4.2@2252.8,2125
NetL2_1: L2.1 L3.2 | length 299.4
  Top Layer w80: L3.2@604,3534 604,3236 L2.1@605,3235
NetL7_2: L7.2 U8.2 | length 150
  Bottom Layer w50: L7.2@220,1795 U8.2@220,1945
NetLED1_1: LED1.1 R1.2 | length 110
  Top Layer w45: R1.2@3312,1960 LED1.1@3312,2070
NetLED2_1: LED2.1 R3.2 | length 109.3
  Top Layer w40: LED2.1@2972,3736 2992,3716 R3.2@2992,3635
NetLED3_1: LED3.1 R19.2 | length 83.7
  Top Layer w40: R19.2@2907,678 2911,682 LED3.1@2911,760
NetP2_1: P2.1 U3.11 | length 332.4
  Top Layer w25: U3.11@2929,2378.06 3259.94,2378.06 P2.1@3261,2377
NetP3_2: P3.2 R5.2 U3.21 | length 1335.2
  Top Layer w15: R5.2@2196.56,2225 v1(2318,2225) 2339,2204 2339,2038 2376.9,2000.1 U3.21@2448.68,2000.1
  Bottom Layer w12: P3.2@2174,1397.57 2183.57,1397.57 2318,1532 v1(2318,2225)
NetP3_3: P3.3 R6.2 U3.20 | length 1375
  Top Layer w15: R6.2@2196.56,2305 2326,2305 v1(2361,2270) 2361,2060 2377.59,2043.41 U3.20@2448.68,2043.41
  Bottom Layer w15: P3.3@2174,1497 2278,1601 2278,2257 2291,2270 v1(2361,2270)
NetR2_1: R2.1 R4.2 U2.4 | length 665.9
  Top Layer w30: U2.4@1670.02,3525.01 1670.02,3655.02 1777,3762 2008,3762 R4.2@2053,3807
  Top Layer w40: R4.2@2053,3821 R2.1@2143,3821
NetR7_1: R7.1 U3.8 | length 147.9
  Top Layer w25: U3.8@2928.87,2248.13 2988.87,2248.13 R7.1@3051,2186
NetR7_2: R7.2 U3.9 | length 128.4
  Top Layer w25: U3.9@2929,2291.44 3035.56,2291.44 R7.2@3051,2276
NetR8_1: R8.1 U5.1 | length 161.1
  Top Layer w10: R8.1@2020,807 2020.78,806.22 U5.1@2180.79,806.22
NetR9_1: R9.1 R10.2 U7.3 | length 150.4
  Top Layer w25: R9.1@762,867 804,867 ; U7.3@782.04,803.74 782.04,845.04 804,867 ; R10.2@840,867 804,867
NetR9_2: R9.2 T5.1 U6.1 U7.4 | length 356.9
  Top Layer w25: U6.1@416,727 482,727 T5.1@557,802 671.81,802 U7.4@673.61,800.2 673.61,865.39 R9.2@672,867
NetR11_1: R11.1 U5.12 | length 163.9
  Top Layer w10: R11.1@2017,590 2017.32,589.68 U5.12@2180.79,589.68
NetR12_2: R12.2 U7.1 | length 127.4
  Top Layer w25: U7.1@782,725 908,725 R12.2@909,726
NetR14_1: R14.1 T3.1 U5.5 | length 718.7
  Top Layer w10: T3.1@1552.52,727.48 U5.5@2180.79,727.48
  Top Layer w25: R14.1@1497,726 1586,726 T3.1@1587,727
NetR24_1: R24.1 U9.4 | length 66.7
  Top Layer w25: R24.1@3259,1336 3259.2,1335.8 U9.4@3259.2,1269.39
NetR25_1: R25.1 U10.4 | length 71.7
  Top Layer w25: R25.1@3257,604 3257,532.58 U10.4@3257.2,532.39
TOD_RX: U5.27
TOD_TX: P4.3 U5.26 | length 1381.4
  Top Layer w10: P4.3@1083,151 1218,16 2090,16 2243.78,169.78 U5.26@2243.78,270.79
VCC5V: C18.1 C19.1 C23.1 C24.2 L5.1 L6.1 U6.5 U7.5 U8.5 Y1.3 Y2.2 | length 7093.9
  Top Layer w25: U6.5@307.58,727 307.58,664.42 C18.1@316,656 316,648 375,589 ; U7.5@673.58,725 673.58,656.58 C19.1@673,656 600,583 ; 375,589 389.5,574.5 ; 375,589 594,589 600,583 ; 389.5,574.5 403,561 578,561 591.5,574.5 ; 389.5,574.5 591.5,574.5 ; 591.5,574.5 600,583
  Top Layer w30: v3(465,894) 656,1085 656,2103 656,2116 641.77,2130.23
  Top Layer w60: C23.1@2090,2435 C23.1@2110,2455 ; C23.1@2110,2455 2141.6,2486.6 C24.2@2141.6,2525 L6.1@2141.6,2610 L5.1@2141.6,2695 2113,2695 2110,2692 2110,2493 C23.1@2110,2455
  Top Layer w80: Y1.3@360,1618.9 360,1733 ; U8.5@1819.21,2744.21 1819.21,2496.79 ; C23.1@2090,2435 2052,2435 ; 2110,2493 2052,2435 ; 360,1733 467.5,1840.5 ; 360,1733 360,1807 467.5,1914.5 ; 467.5,1840.5 467.5,1914.5 ; 467.5,1840.5 510.27,1883.27 510.27,1957.27 ; 467.5,1914.5 467.5,1955.96 510.27,1998.73 ; 467.5,1914.5 510.27,1957.27 ; 510.27,1957.27 510.27,1998.73 ; 510.27,1957.27 585,2032 ; 510.27,1998.73 Y2.2@585,2073.46 ; 585,2032 Y2.2@585,2073.46 ; 585,2032 656,2103 988,2435 ; Y2.2@585,2073.46 641.77,2130.23 946.54,2435 988,2435 ; 988,2435 1760,2435 ; 1760,2435 1819.21,2494.21 1819.21,2496.79 ; 1760,2435 1881,2435 ; 1819.21,2496.79 1881,2435 ; 1881,2435 2052,2435
  Bottom Layer w30: v3(461,573) 465,577 v3(465,894)
pads on no net: P5.6 P5.7 P5.8 U2. U3.1 U3.2 U3.4 U3.5 U3.6 U3.7 U3.14 U3.15 U3.16 U3.17 U3.18 U3.19 U5.2 U5.3 U5.4 U5.6 U5.7 U5.8 U5.14 U5.15 U5.16 U5.17 U5.18 U5.19 U5.20 U5.21 U5.28 U5.29 U5.30 U5.33 U5.34 U5.35 U5.36 U5.37 U5.38 U5.40 U5.41 U5.42 U5.43 U5.44 U5.47 U5.48 U5.49 U5.50 U5.51 U5.52 U5.53 U5.55 U5.56 U5.57 U5.58 U5.61 U5.62 U5.64 U5.66 U5.67 U5.68 U5.69 U5.70 U5.71 U5.81 U5.82 U5.83 U5.84 U5.85 U5.86 U5.87 U5.88 U5.89 U5.90 U5.91 U5.92 U5.95 U5.96 U5.97 U5.98 U5.99 U5.100 U8. U8.6 U8.7 U8.8 U8.J1-1 U8.J1-2 U8.J1-3 U8.J1-4 U8.J1-5 U8.J1-6 U8.J1-7 U8.J1-8 U8.J1-9 U8.J1-10 U8.J1-11 U8.J1-12 U8.J1-13 U8.J1-14 U8.J1-15 U8.J1-16 U8.J1-17 U8.J1-18 U8.J1-19 U8.J1-20 Y1.2
copper on no net: | length 1482.8
  Top Layer w10: 2676.85,270.79 2676.85,166.15 2698,145 2698,111 ; 2696.54,270.79 2696.54,196.46 2750,143 2750,111 ; 2716.22,270.79 2716.22,220.78 2803,134 2803,111 ; 2779.21,353.46 2822.54,353.46 2839,337 2839,275 2912,202 2912,139 2912,111 ; 2779.21,373.15 2839.85,373.15 2852,361 2859,354 2859,286 2966,179 2966,112 ; 2814.22,333.78 2814.22,265.78 2855,225 2855,111

## Keep-outs
Keep-Out Layer:
  the board outline again, w7

## Other copper
Top Layer:
  rectangle net GND: 1125,2956 1382,3865
  rectangle net GND: 3003,67 3052,255
  rectangle net GND: 2661,46 3059,77
  rectangle net +3.3V: 2598,1580 2854,1758
  rectangle net GND: 1086,2157 1284,2355
  rectangle net GND: 1258,1704 1484,2199
  rectangle net GND: 2530.5,2421.36 2856,2477.5
  rectangle net GND: 2517,1818 2866,2430
  rectangle net GND: 3060,3066 3397,3336
  rectangle net GND: 3301,2885 3387,3082
  rectangle net GND: 3061,2897 3128,3082
  rectangle net GND: 2990,2421.36 3103,2477
  region net GND: 1897,2848 1970,2848 2061,2757 2043,2739 2043,2553 2006,2516 1925,2516 1925,2828 1909,2844
  region net GND: 553,2944 1863,2944 1953,2854 1953,2847 1542,2847 1512,2817 1512,2586 1466,2540 1466,2531 909,2531 602,2224 583,2224 583,2863 587,2867 523,2931 523,2940
  region net GND: 3070,322 3076,322 3121,367 3394,367 3394,32.34 3394.5,31.84 3056,31.84
  region net GND: 1,3897.5 3,3899.5 395.5,3899.5 338,3842 338,3610 335,3610 212,3487 5,3487
  region net GND: 28,659 28,627 279,376 277,374 277,33 -3,33 -5,31 -5,598
  region net GND: 439,3452 511,3452 511,3130 535,3106 285,3106 285,3230 253,3262 253,3266
  region net GND: 2989,3897 3392,3897 3394.5,3899.5 3394.5,3313 3060,3313 3060,3336 3056,3375 3060,3375 3060,3823 3005,3878
  region net GND: 2308,3878 2308,3786 2341,3753 2341,3752 2419,3752 2536,3635 2536,3726 2546,3736 2529,3753 2524,3753 2524,3870 2514,3880
  region net GND: 2696,3878 2696,3757 2666,3727 2529,3727 2529,3645 2539,3635 2799,3635 2799,3874 2795,3878
  region net GND: 2478,3309 2482,3313 2875,3313 2875,2960 2878,2957 2874,2953 2603,2953 2458,3098
  region net GND: 1647,392 1649,394 1863,394 1863,375 1762,274 1689,274 1639,324 1639,396
  region net GND: 80.25,766.37 259,766.37 259,597 340,516 616,516 684,584 1596.25,584 1596.25,484.75 1643,438 1643,400 1639,396 1393,396 1283,286 1283,216.5 279,216.5 279,377 69,587 69,590
  region net GND: 2383.35,800 2603,800 2616,787 2616,601 2667,550 2710,550 2711,549 2711,510.94 2629.94,510.94 2594,475 2594,371 2562,339 2361.89,339 2361.89,349.89 2383.35,371.35
  region net GND: 2388,200 2443,200 2446,197 2432,134 2389,166 2389,198
  region net GND: 2044,1334 2111,1267 2111,1039 2203,947 2203,846 2088,846 2069,865 1910,865 1899,876 2032,1009 2041,1009
  region net GND: 717,1543 1424,1543 1425,1544 1430,1539 1430,984 1484,930 1484,920 582,920 578,924 713,1059 713,1070
  region net GND: 1028,2355 1086,2355 1086,1544 718,1544 717,1543 717,2044
  region net GND: 1222.5,1862 1359,1862 1352.5,1829.5 1333,1797 1318,1782 1322,1778 1322,1694 1286,1658 1286,1544 1091,1544 1079,1556 1084,1561 1084,1725 1213,1725 1222.5,1734.5
  region net GND: 1240,2139 1348,2139 1354,2133 1345,2124 1345,1871 1095,1871 1095,2000 1180,2000 1182,1998 1184,2000 1210,2000 1241,2031 1241,2130
  region net GND: 1421,1758 1893,1758 1913,1738 1913,1224 1910,1221 1824,1221 1824,1302 1759,1367 1569,1367 1425,1223
  region net GND: 1420,2370 2042,2370 1911,2239 1911,2159 1913,2157 1911,2155 1911,2144 1715,2144 1628,2057 1622,2057 1622,1743 1611,1732 1604,1739 1429,1739 1429,2289 1424,2294
  region net GND: 2513,2762 2520,2769 2989,2769 3064,2844 3064,2880 3385.5,2880 3392.5,2887 3394.5,2885 3394.5,2549 3135,2549 3076,2490 3076,2479 2385,2479 2468,2562 2468,2715 2460,2723
  region net GND: 2262,1237 2678,1237 2742,1301 3023,1301 3023,1271 3036,1258 2815,1037 2815,860 2808,853 2765,853 2765,921 2756,930 2735,930 2700,965 2700,1112 2687,1112 2653,1146 2648,1141 2233,1141
  region net GND: 2295,1837 2534,1837 2540,1831 2540,1521 2325,1521 2258,1588 2244,1588 2244,1625 2211.96,1657.04 2115,1657.04 2112.96,1659.07 2112.96,1770 2217,1770 2222,1765 2299.5,1842.5 2302.5,1842.5